# Altium PCB 2.3.PcbDoc
Units mil, origin at the board's own origin, x right, y up, seen from the top; angles counter-clockwise.
Board outline 3815 x 3365 mil, 2 copper layers (Top Layer, Bottom Layer); 23 components, 34 nets, 115 pads, 8 vias.
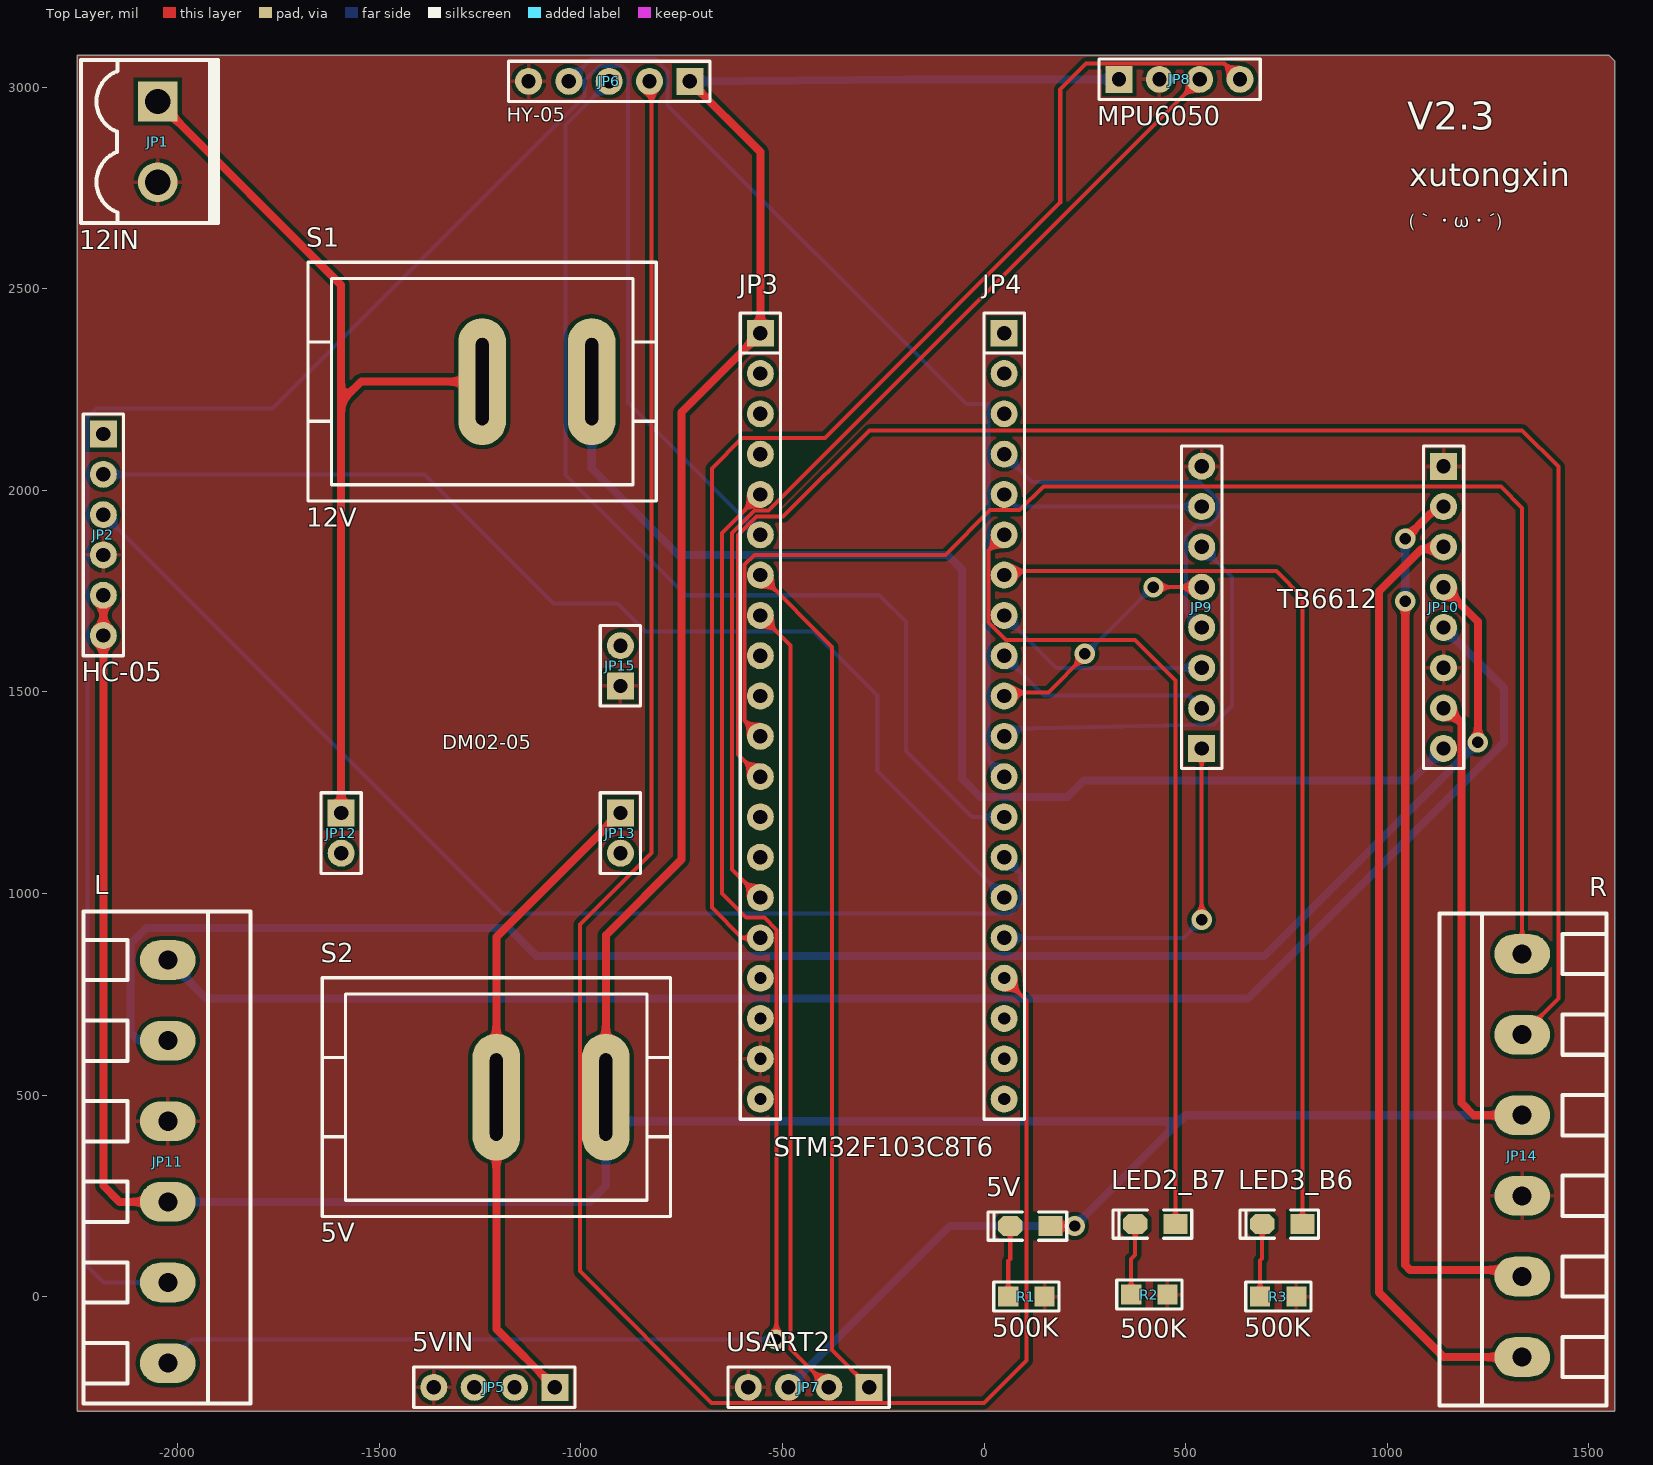
[diagram p0: Top Layer view]
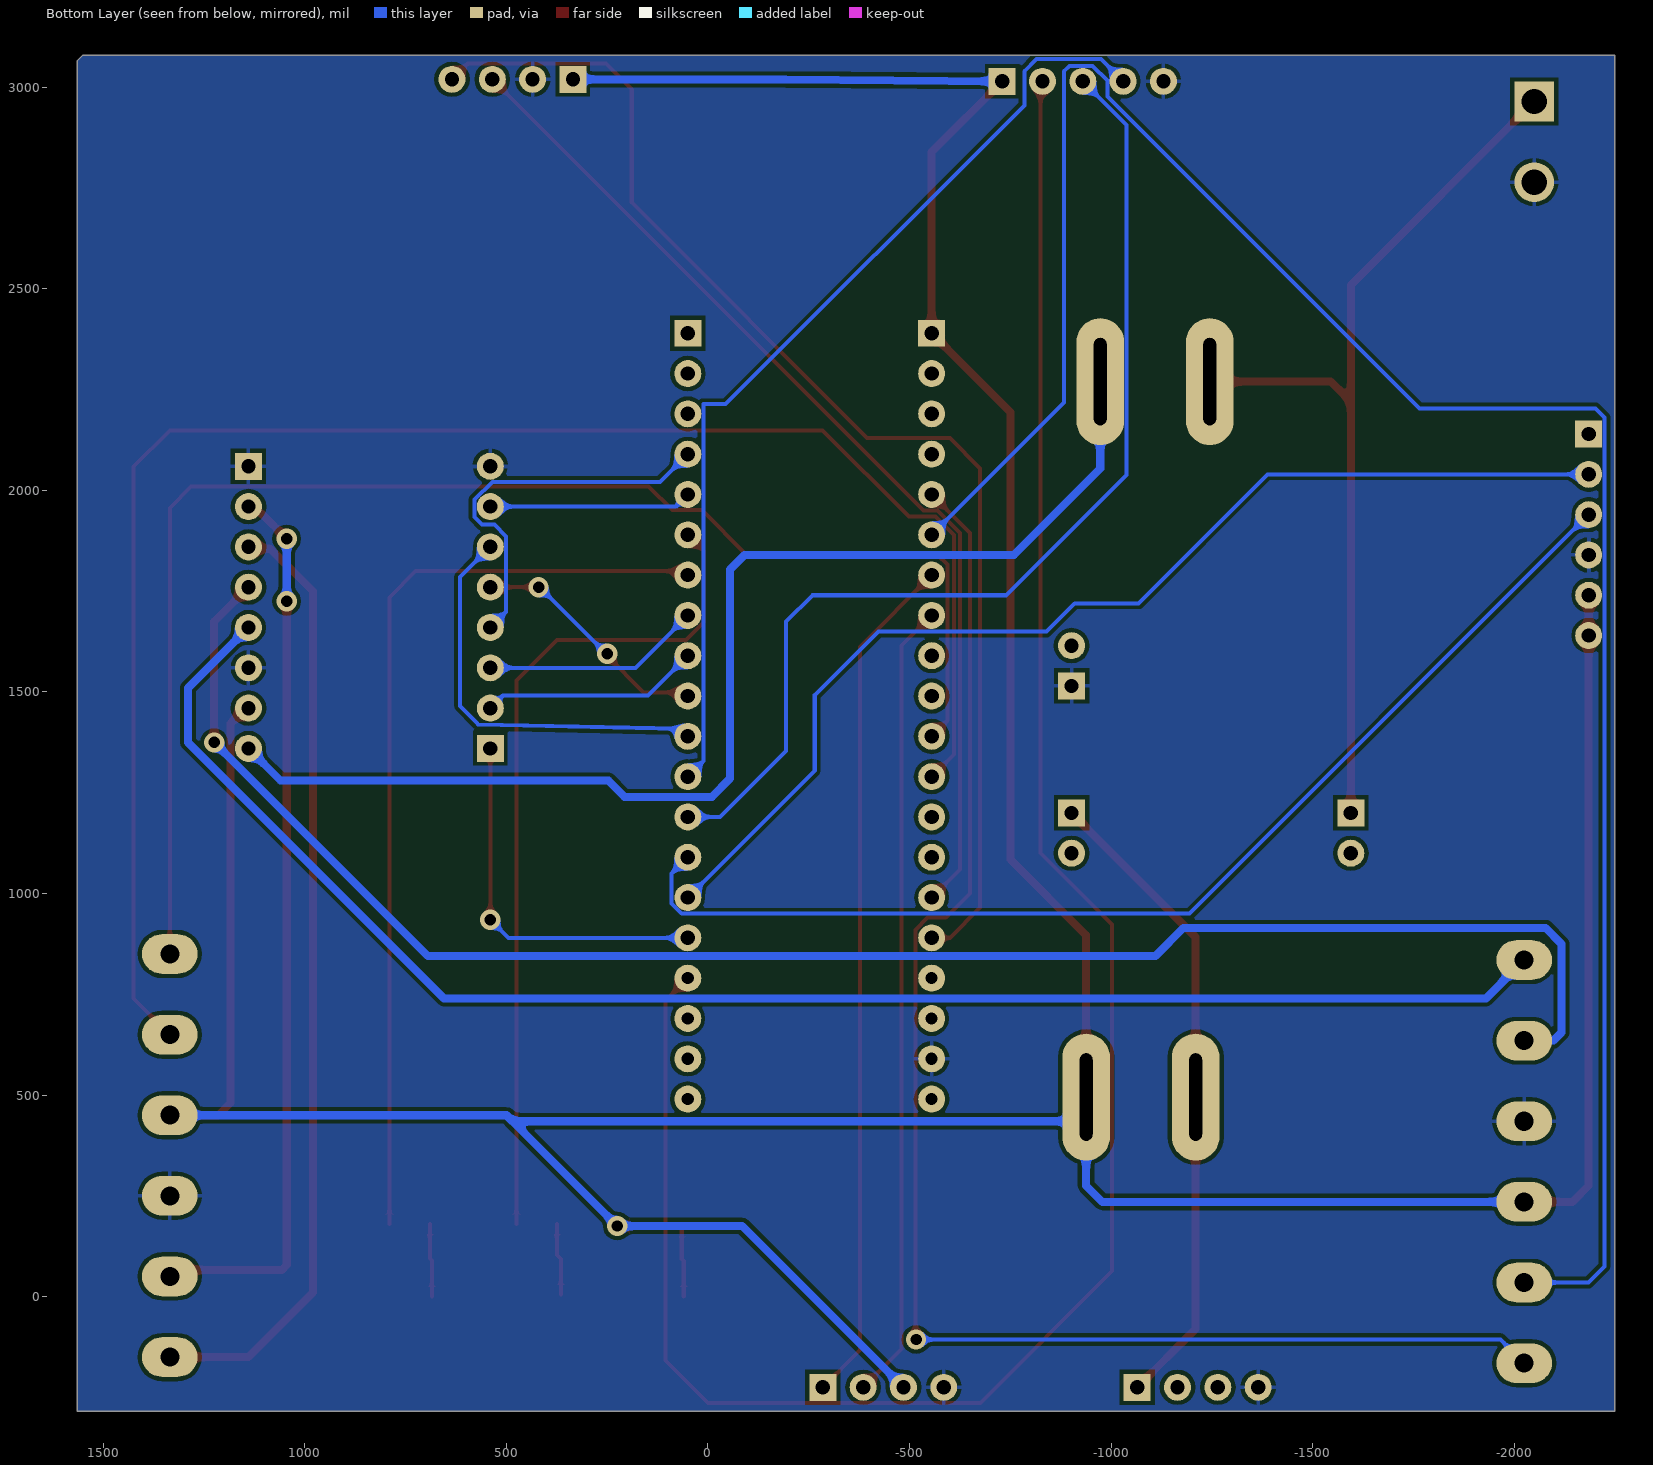
[diagram p1: Bottom Layer view, seen from below]

## Layer stack, top to bottom
Top Solder: solder mask 0.4, Solder Resist, Dk 3.5
Top Layer: signal copper 1.4
Dielectric 1: dielectric 12.6, FR-4, Dk 4.8
Bottom Layer: signal copper 1.4
Bottom Solder: solder mask 0.4, Solder Resist, Dk 3.5

## Board outline
-2250,-285 1565,-285 1565,3065.52 1550.52,3080 -2250,3080

## Design rules (kind name [scope] priority, off if disabled: settings)
Clearance [All] p1: gap=10 ignorepadtopadclearanceinfootprint=FALSE except(0: Arc-Hole Track-Hole SMDPad-Hole THPad-Hole Via-Hole Fill-Hole Poly-Hole Region-Hole Text-Hole)
PolygonConnect [All] p1: connectstyle=Relief reliefconductorwidth=10 reliefentries=4 polygonreliefangle="90 Angle" airgapwidth=10
RoutingVias [All] p1: holewidth=28 width=50 viastyle="Through Hole" minholewidth=28 minwidth=50 maxholewidth=28 maxwidth=50
SignalTopValue [All] p1: minimum=5.000
SilkToSilkClearance [All] p1: silktosilkclearance=0
SilkToSolderMaskClearance [IsPad] p1: minsilkscreentomaskgap=0 clearancetoexposedcopper=TRUE
SolderMaskExpansion [All] p1: expansion=4 istentingtop=FALSE
Width [All] p1: maxlimit=20 minlimit=10 preferedwidth=10
28 further rules are at their usual default settings.

## Classes and differential pairs
component class 0.3: 5V JP1 JP2 JP3 JP4 JP5 JP8 JP10 JP12 JP15 LED2_B7 LED3_B6 R1 R2 R3 S1 S2

## Components (designator, comment, footprint, x,y, rotation, side; value= is the part's Value field where it differs from the comment)
5V "绿色" "LED 0805G" 115,175 r180 top (schematic designator LED1)
JP1 "12IN" KF2EDGK5.08-LI-2P -2050,2865 r270 top
JP2 "HC-05" HDR2.54-M-LI-6P -2185,1890 r270 top
JP3 "STM32F103C8T6" HDR2.54-M-LI-20P -555,1440 r270 top
JP4 "HDR-1X20" HDR2.54-M-LI-20P 50,1440 r270 top
JP5 "5VIN" HDR2.54-M-LI-4P -1215,-225 r180 top
JP6 "HY-05" HDR2.54-M-LI-5P -930,3015 r180 top
JP7 "USART2" HDR2.54-M-LI-4P -435,-225 r180 top
JP8 "MPU6050" HDR2.54-M-LI-4P 485,3020 r0 top
JP9 "HDR-1X8" HDR2.54-M-LI-8P 540,1710 r90 top
JP10 "TB6612" HDR2.54-M-LI-8P 1140,1710 r270 top
JP11 "L" KF128-5.08-6P -2025,335 r270 top
JP12 "HDR-1X2" HDR2.54-M-LI-2P -1595,1150 r270 top
JP13 "HDR-1X2" HDR2.54-M-LI-2P -902.09,1150 r270 top
JP14 "R" KF128-5.08-6P 1335,350 r90 top
JP15 "DM02-05" HDR2.54-M-LI-2P -902.09,1565 r90 top
LED2_B7 "红色" "LED 0805G" 425,180 r180 top (schematic designator LED2)
LED3_B6 "红色" "LED 0805G" 740,180 r180 top (schematic designator LED3)
R1 "500K" "R 0805_M" 105,0 r0 top
R2 "500K" "R 0805_M" 410,5 r0 top
R3 "500K" "R 0805_M" 730,0 r0 top
S1 "12V" KCD1-101 -1245,2270 r0 top
S2 "5V" KCD1-101 -1210,495 r0 top

## Footprints (in the part's own frame and the unit in brackets; to place one, negate y for a bottom-side part, rotate by r counter-clockwise, add the part's x,y. Pads: shape width x height; smd on the part's side, far side on the other; paste and mask are expansions set on the pad)
HDR2.54-M-LI-2P [mm] "排母，2脚    淘宝ID:黄晶宝石   店铺网址:https://shop463601444.taobao.com"
  rect 1.7x1.7 hole 0.9: 1(-1.27,0)
  round 1.7 hole 0.9: 2(1.27,0)
  silkscreen extent -2.54,-1.27 2.54,1.27, body extent -2.54,-1.27 2.54,1.27, height 8.5
HDR2.54-M-LI-4P [mm] "排母，4脚  淘宝ID:黄晶宝石   店铺网址:https://shop463601444.taobao.com"
  rect 1.7x1.7 hole 0.9: 1(-3.81,0)
  round 1.7 hole 0.9: 2(-1.27,0) 3(1.27,0) 4(3.81,0)
  silkscreen extent -5.08,-1.27 5.08,1.27, body extent -5.08,-1.27 5.08,1.27, height 8.5
HDR2.54-M-LI-5P [mm] "排母，5脚   淘宝ID:黄晶宝石   店铺网址:https://shop463601444.taobao.com"
  rect 1.7x1.7 hole 0.9: 1(-5.08,0)
  round 1.7 hole 0.9: 2(-2.54,0) 3(0,0) 4(2.54,0) 5(5.08,0)
  silkscreen extent -6.35,-1.27 6.35,1.27, body extent -6.35,-1.27 6.35,1.27, height 8.5
HDR2.54-M-LI-6P [mm] "排母，6脚  淘宝ID:黄晶宝石   店铺网址:https://shop463601444.taobao.com"
  rect 1.7x1.7 hole 0.9: 1(-6.35,0)
  round 1.7 hole 0.9: 2(-3.81,0) 3(-1.27,0) 4(1.27,0) 5(3.81,0) 6(6.35,0)
  silkscreen extent -7.62,-1.27 7.62,1.27, body extent -7.62,-1.27 7.62,1.27, height 8.5
HDR2.54-M-LI-8P [mm] "排母，8脚"
  rect 1.7x1.7 hole 0.9: 1(-8.89,0)
  round 1.7 hole 0.9: 2(-6.35,0) 3(-3.81,0) 4(-1.27,0) 5(1.27,0) 6(3.81,0) 7(6.35,0) 8(8.89,0)
  silkscreen extent -10.16,-1.27 10.16,1.27, body extent -10.16,-1.27 10.16,1.27, height 8.5
HDR2.54-M-LI-20P [mm] "排母，20脚"
  rect 1.7x1.7 hole 0.9: 1(-24.13,0)
  round 1.7 hole 0.9: 2(-21.59,0) 3(-19.05,0) 4(-16.51,0) 5(-13.97,0) 6(-11.43,0) 7(-8.89,0) 8(-6.35,0) 9(-3.81,0) 10(-1.27,0) 11(1.27,0) 12(3.81,0) 13(6.35,0) 14(8.89,0) 15(11.43,0) 16(13.97,0)
  round 1.7 hole 0.762: 17(16.51,0) 18(19.05,0) 19(21.59,0) 20(24.13,0)
  silkscreen extent -25.4,-1.27 25.4,1.27, body extent -25.4,-1.27 25.4,1.27, height 8.5
KCD1-101 [mm] "船型开关立式      淘宝ID:黄晶宝石"
  oval 3x8 hole 0.8 slot 5.5 at 90 deg: 1(0,0) 2(6.9,0)
  silkscreen extent -10.97,-7.52 10.97,7.52, body extent -10.95,-7.5 10.95,7.5, height 20.3
KF2EDGK5.08-LI-2P [mm] "立插端子"
  rect 2.5x2.5 hole 1.6: 1(-2.54,0)
  round 2.5 hole 1.6: 2(2.54,0)
  silkscreen extent -5.16,-4.83 5.13,3.81, body extent -5.08,-4.75 5.08,3.75, height 11.25
KF128-5.08-6P [mm] "螺钉式接线端子，脚距5.08mm"
  oval 2.5x3.5 hole 1.2: 1(-12.7,0) 2(-7.62,0) 3(-2.54,0) 4(2.54,0) 5(7.62,0) 6(12.7,0)
  silkscreen extent -15.75,-5.31 15.24,5.21, body extent -15.74,-5.3 15.24,5.2, height 14.15
"LED 0805G" [mil] "绿色0805LED                              淘宝ID:黄晶宝石"
  rect 60x50 smd: 1(-50,0)
  oct 60x50 smd: 2(50,0)
  silkscreen extent -90,-35 105,35, body extent -39,-25 39,25, height 32
"R 0805_M" [mil] "1/8W贴片电阻"
  rect 50x50 smd: 1(-45,0) 2(45,0)
  silkscreen extent -81,-36 81,36, body extent -39,-25 39,25, height 20

## Part data
5V LED2_B7 LED3_B6: library part LED-SMD, "贴片LED", 学习资源=www.ooocke.com, 版权归属=源创客
  5V: BOM名称=电源指示
  LED2_B7 LED3_B6: BOM名称=贴片LED
JP1 JP12 JP13 JP15: library part "Header 2", "2P接插件"
  JP1: BOM名称=12V进入, 学习资源=www.ooocke.com, 版权归属=源创客
  JP12: BOM名称=DM02-2, 版权归属="封装库来自淘宝 ID：黄晶宝石", 联系售后=https://shop463601444.taobao.com
  JP13: BOM名称=DM02-1, 版权归属="封装库来自淘宝 ID：黄晶宝石", 联系售后=https://shop463601444.taobao.com
  JP15: BOM名称=DM02-3, 版权归属="封装库来自淘宝 ID：黄晶宝石", 联系售后=https://shop463601444.taobao.com
JP2 JP11 JP14: library part "Header 6", "6P接插件"
  JP2: BOM名称=HC-05, 学习资源=https://shop463601444.taobao.com, 版权归属="封装库来自淘宝 ID：黄晶宝石"
  JP11: BOM名称=左电机, 学习资源=www.ooocke.com, 版权归属=源创客
  JP14: BOM名称=右电机, 学习资源=www.ooocke.com, 版权归属=源创客
JP3 JP4: library part "Header 20", "20P接插件", 学习资源=https://shop463601444.taobao.com, 版权归属="封装库来自淘宝 ID：黄晶宝石"
  JP3: BOM名称=stm32-P3
  JP4: BOM名称=stm32-P4
JP5 JP7 JP8: library part "Header 4", "4P接插件", 学习资源=https://shop463601444.taobao.com, 版权归属="封装库来自淘宝 ID：黄晶宝石"
  JP5: BOM名称=USB-C
  JP7: BOM名称=USART2
  JP8: BOM名称=6050
JP6: library part "Header 5", "5P接插件", BOM名称=5P接插件, 学习资源=https://shop463601444.taobao.com, 版权归属="封装库来自淘宝 ID：黄晶宝石"
JP9 JP10: library part "Header 8", "8P接插件", 学习资源=https://shop463601444.taobao.com, 版权归属="封装库来自淘宝 ID：黄晶宝石"
  JP9: BOM名称=TB6612接插件1
  JP10: BOM名称=TB6612接插件2
R1 R2 R3: library part R, "贴片电阻", BOM名称=贴片电阻, 版权归属="来自淘宝 ID：黄晶宝石", 联系售后=https://shop463601444.taobao.com
  R2: ComponentLink1Description="New link"
S1 S2: library part KCD1-101, "1路单刀船型开关", BOM名称=1路单刀船型开关, 学习资源=www.ooocke.com, 版权归属="封装库来自淘宝 ID：黄晶宝石"

## Via types
v1: diameter 50, hole 28, Top Layer to Bottom Layer, 8 vias

## Nets (pads, with @x,y where several pads share a name; then routed paths per layer and width w, separated by ;. In a path a pad name is that pad's centre, name@x,y a point inside that pad or via, vN(x,y) a via of type N, cw(c..) or ccw(c..) an arc to the next point about the centre after c; other vN are vias at no path point)
5V: 5V.1 JP2.5 JP2.6 JP3.1 JP6.1 JP7.3 JP8.1 JP10.7 JP11.4 JP14.4 S2.2 | length 11562.5
  Top Layer w20: JP2.5 JP2.6 -2185,275 -2145,235 JP11.4 ; S2.2 -938.35,896.65 -751,1084 -751,2194 JP3.1 -555,2840 JP6.1 ; 5V.1 v1(225,175) ; JP10.7 1146.82,1460 1185,1421.82 1185,480 1215,450 JP14.4
  Bottom Layer w20: JP11.4 -978.35,235 -938.35,275 -938.35,450 S2.2 -938.35,480.32 -893.03,435 485,435 ; JP6.1 -192,3020 JP8.1 ; JP7.3 -85,175 v1(225,175) 485,435 ; JP14.4 500,450 485,435
5V_IN: JP5.1 JP13.1 S2.1 | length 1612.6
  Top Layer w20: JP5.1 -1210,-80 S2.1 -1210,892.09 JP13.1
12V: JP10.8 S1.2 | length 3020
  Bottom Layer w20: S1.2 -973.35,2054.49 -758.86,1840 -91,1840 -55,1804 -55,1285 -10,1240 207,1240 246.93,1279.93 1059.93,1279.93 JP10.8
12V_IN: JP1.1 JP12.1 S1.1 | length 2324.2
  Top Layer w20: JP1.1 -1595,2510 -1595,2220 ; JP12.1 -1595,2220 ; S1.1 -1545,2270 -1595,2220
A01: JP10.5 JP11.1 | length 3964.5
  Bottom Layer w20: JP11.1 -1930,740 655,740 1290,1375 1290,1510 JP10.5
A02: JP10.4 JP11.2 | length 4349.6
  Top Layer w20: JP10.4 1225,1675 v1(1225,1375)
  Bottom Layer w20: JP11.2 -2098,635 -2118,655 -2118,875 -2078,915 -1180,915 -1110,845 695,845 v1(1225,1375)
AIN1: JP4.8 JP9.3 | length 543.8
  Bottom Layer w10: JP4.8 180,1560 JP9.3
AIN2: JP4.9 JP9.2 | length 543.8
  Bottom Layer w10: JP4.9 149,1491 509,1491 JP9.2
B01: JP10.3 JP14.1 | length 2366.8
  Top Layer w20: JP10.3 1135.12,1855.12 1085.12,1855.12 980,1750 980,10 1140,-150 JP14.1
B02: JP10.2 JP14.2 | length 2231.7
  Top Layer w20: v1(1045,1725) 1045,78.07 1056.72,66.35 1318.65,66.35 JP14.2 ; v1(1045,1880) 1107.62,1942.62 1109.92,1942.62 1127.3,1960 JP10.2
  Bottom Layer w20: v1(1045,1725) v1(1045,1880)
BIN1: JP4.10 JP9.5 | length 604.8
  Top Layer w10: JP4.10 59.27,1499.27 159.27,1499.27 250,1590 v1(250,1595) ; v1(420,1760) JP9.5
  Bottom Layer w10: v1(250,1595) 252.5,1595 417.5,1760 v1(420,1760)
BIN2: JP4.11 JP9.6 | length 1017.7
  Bottom Layer w10: JP4.11 68.82,1408.82 570.45,1419.9 573.3,1422.81 615,1465.45 615,1785 JP9.6
BRX: JP2.2 JP4.15 | length 2779.5
  Bottom Layer w10: JP2.2 -1388,2040 -1068,1720 -910,1720 -840,1650 -423,1650 -265,1492 -265,1305 JP4.15
BTX: JP2.3 JP4.14 | length 2827
  Bottom Layer w10: JP2.3 -1195,950 65,950 90,975 90,1050 JP4.14
GND: JP1.2 JP2.4 JP3.19 JP5.4 JP6.5 JP7.4 JP8.2 JP9.8 JP10.1 JP10.6 JP11.3 JP14.3 JP15.1 R1.2 R2.2 R3.2
HYIN: JP4.13 JP6.3 | length 2649
  Bottom Layer w10: JP6.3 -1038,2907 -1038,2038 -740,1740 -259,1740 -194,1675 -194,1354 -30,1190 JP4.13
HYOUT: JP4.12 JP6.4 | length 2408.3
  Bottom Layer w10: JP6.4 -975,3070 -815,3070 -785,3040 -785,2955 -44,2214 11,2214 11,1329 JP4.12
HYRUN: JP4.17 JP6.2 | length 5286.5
  Top Layer w10: JP6.2 -825,3010 -825,1101 -1003,923 -1003,63 -676,-264 0,-264 105,-159 105,735 JP4.17
L2_B7: JP4.6 LED2_B7.1 | length 2105.8
  Top Layer w10: JP4.6 11,1851 11,1673 55,1629 375,1629 475,1529 LED2_B7.1
L3_B6: JP4.7 LED3_B6.1 | length 2326.1
  Top Layer w10: JP4.7 60,1800 725,1800 790,1735 LED3_B6.1
LA: JP3.5 JP11.6 | length 3751.5
  Top Layer w10: JP3.5 -650,1895 -650,1000 -590,940 -545,940 -515,910 -515,-105 v1(-516.54,-106.54)
  Bottom Layer w10: JP11.6 -1966.54,-106.54 v1(-516.54,-106.54)
LB: JP3.6 JP11.5 | length 5338.8
  Bottom Layer w10: JP11.5 -2184,35 -2224,75 -2224,2181 -2202,2203 -1765,2203 -991,2977 -991,3017 -954.53,3053.47 -896.47,3053.47 -883,3040 -883,2218 JP3.6
NetLED1_2: 5V.2 R1.1 | length 177.1
  Top Layer w10: R1.1 60,88 65,93 5V.2
NetLED2_2: LED2_B7.2 R2.1 | length 179.1
  Top Layer w10: R2.1 365,93 375,103 LED2_B7.2
NetLED3_2: LED3_B6.2 R3.1 | length 182.1
  Top Layer w10: R3.1 685,90 690,95 LED3_B6.2
PWMA-PA8: JP4.16 JP9.1 | length 933.6
  Top Layer w10: v1(540,935) JP9.1
  Bottom Layer w10: JP4.16 495,890 v1(540,935)
PWMB-PB8: JP4.5 JP9.7 | length 502.4
  Bottom Layer w10: JP4.5 80,1960 JP9.7
RA: JP3.11 JP14.6 | length 3580.5
  Top Layer w10: JP3.11 -594,1429 -594,1816 -570,1840 -96,1840 15,1951 88,1951 147,2010 1282,2010 1335,1957 JP14.6
RB: JP3.12 JP14.5 | length 4248.6
  Top Layer w10: JP3.12 -610,1345 -610,1890 -565,1935 -498.24,1935 -284.24,2149 1335,2149 1425,2059 1425,740 JP14.5
SCL2: JP3.15 JP8.3 | length 2560
  Top Layer w10: JP3.15 -625,1060 -625,1895 -570,1950 -535,1950 JP8.3
SDA2: JP3.16 JP8.4 | length 3147.7
  Top Layer w10: JP3.16 -600,890 -675,965 -675,2055 -600,2130 -395,2130 189,2714 189,2995 253,3059 596,3059 JP8.4
STBY: JP4.4 JP9.4 | length 958.8
  Bottom Layer w10: JP4.4 119,2021 535,2021 579,1977 579,1934 560,1915 530,1915 501,1886 501,1699 JP9.4
USART2_RX: JP3.8 JP7.2 | length 1985.4
  Top Layer w10: JP3.8 -480,1615 -480,-130 JP7.2
USART2_TX: JP3.7 JP7.1 | length 2126.8
  Top Layer w10: JP3.7 -377,1612 -377,-133 JP7.1
pads on no net: JP2.1 JP3.2 JP3.3 JP3.4 JP3.9 JP3.10 JP3.13 JP3.14 JP3.17 JP3.18 JP3.20 JP4.1 JP4.2 JP4.3 JP4.18 JP4.19 JP4.20 JP5.2 JP5.3 JP12.2 JP13.2 JP15.2

## Polygon pours and split planes (outlines as drawn)
GND on Bottom Layer "GND_L02_P001" (solid, remove dead copper, pour order 1): -2250,3080 -2250,-285 1565,-285 1565,3065 1550,3080
GND on Top Layer "GND_L01_P000" (solid, remove dead copper, pour order 0): -2250,3080 -2250,-285 1565,-285 1565,3065 1550,3080

## Silkscreen, mask and mechanical layers (free items; w line width, h text height)
Top Overlay:
  text "V2.3" at 1050,2871.44 h120
  text "xutongxin" at 1055,2735 h100
  text "(｀・ω・´)" at 1055,2640.05 h60
Mechanical 1:
  lines w10: -2250,-285 1565,-285 1565,2270 1565,3065.52 1550.52,3080 -2250,3080 -2250,-285